# EAGLE board CH585M-R1 (EAGLE 7.7.0)
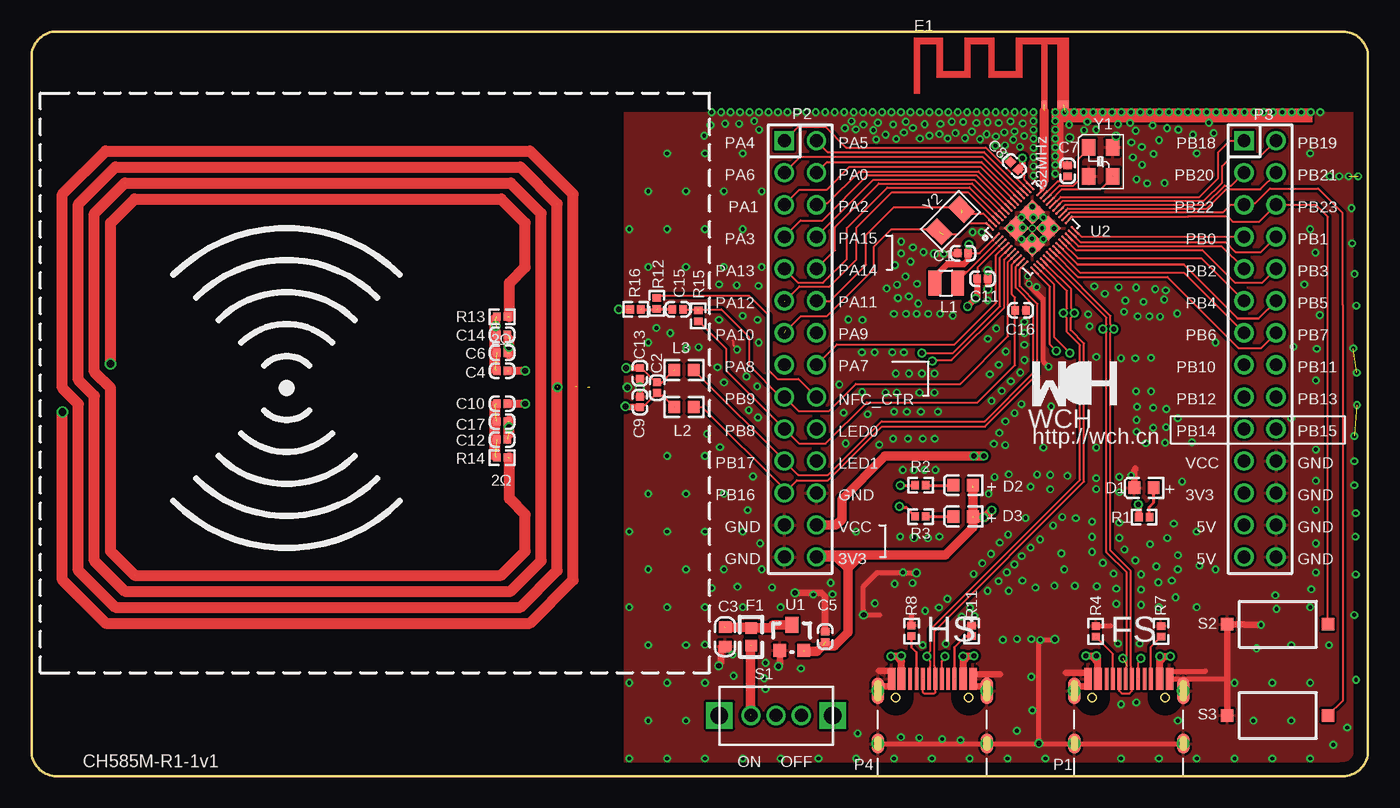
[diagram p0: board, top side]
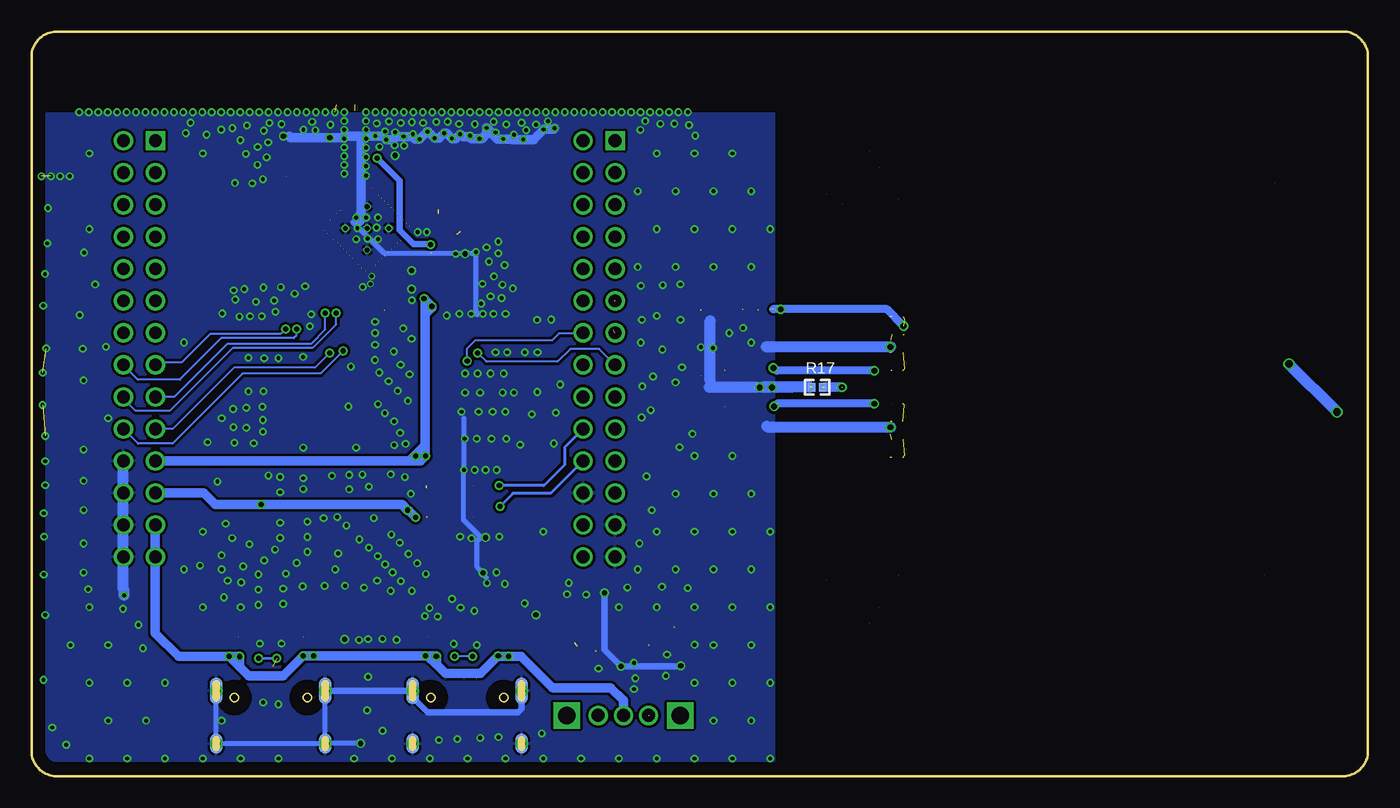
[diagram p1: board, bottom side, seen from below]

Size 106 x 59.08 mm. Coordinates in mm from the lower left corner, seen from the top.
Outline: 1.99,59.08 104,59.08 arc-90 106,57.08 106,2 arc-90 104,0 2,0 arc-90 0,2 0,57.08 arc-90 2,59.08
Copper layers (1*16): Top 0.035mm / dielectric 1.5mm / Bottom 0.035mm
Design rules "default": minimum track width 10mil, minimum drill 0.6mm, track to track 6mil, track to pad 6mil, pad to pad 6mil, via to via 6mil, smd to smd 8mil, copper to edge 40mil, drill to drill 8mil, minimum pad ring 2.5mil, minimum via ring 4mil, stop-mask expansion 4mil, vias tented up to drill 0mil, thermal gap 8mil
tRestrict: area 0,0 to 46.8,59.1; area 42.8,52.9 to 106,59.1; area 71.1,38 to 74,40.2
bRestrict: area 0,0 to 46.8,59.1; area 42.8,52.9 to 106,59.1

## Footprints (pad centres in the part's own frame; a part is rotated, then mirrored left to right if it is on the bottom)
0402_C_8B34AB = smd 0.65 x 0.6: 1 0,0; 2 0,-0.85
0402_C = smd 0.65 x 0.6: 1 0,0; 2 0,-0.85
0603_C = smd 0.93 x 0.98: 1 0,0; 2 1.54,0
0402_C_A5B067 = smd 0.65 x 0.6: 1 0,0; 2 0,-0.85
0402_C_EA6F3D = smd 0.65 x 0.6: 1 0,0; 2 0,-0.85
0603+ = smd 0.93 x 0.98: 1 0,0; 2 1.54,0
ANT-F-1-2.4G-1.6MMFR4 = smd 0.8 x 0.6: 0 1.483,0 | smd 0.4 x 0.6: 1 0,0
0603_8BD959 = smd 0.914 x 0.914: 1 0,0; 2 1.397,0
SMD_2X2MM = smd 1 x 2: 1 -0.905,0; 2 0.905,0
0603 = smd 0.93 x 0.98: 1 0,0; 2 1.54,0
TYPE-C-RECEPTACLE-2.0 = drill 0.6 pad 1: 0 -4.32,-5.15; 0_2 -4.32,-0.97; 0_3 4.32,-5.15; 0_4 4.32,-0.97 | smd 1 x 2.1 bottom: 0_2B -4.32,-0.97; 0_4B 4.32,-0.97 | smd 1 x 2.1: 0_2T -4.32,-0.97; 0_4T 4.32,-0.97 | smd 1 x 1.6 bottom: 0_3B 4.32,-5.15; 0B -4.32,-5.15 | smd 1 x 1.6: 0_3T 4.32,-5.15; 0T -4.32,-5.15 | smd 0.6 x 1.75: A1 -3.225,0; A4 -2.45,0; B1 3.225,0; B4 2.45,0 | smd 0.3 x 1.75: A5 -1.25,0; A6 -0.25,0; A7 0.25,0; A8 1.25,0; B5 1.75,0; B6 0.75,0; B7 -0.75,0; B8 -1.75,0
IDC28-2.54MM = drill 1.016 pad 1.524 square: 1 0,0 | drill 1.016 pad 1.524: 2 2.54,0; 3 0,-2.54; 4 2.54,-2.54; 5 0,-5.08; 6 2.54,-5.08; 7 0,-7.62; 8 2.54,-7.62; 9 0,-10.16; 10 2.54,-10.16; 11 0,-12.7; 12 2.54,-12.7; 13 0,-15.24; 14 2.54,-15.24; 15 0,-17.78; 16 2.54,-17.78; 17 0,-20.32; 18 2.54,-20.32; 19 0,-22.86; 20 2.54,-22.86; 21 0,-25.4; 22 2.54,-25.4; 23 0,-27.94; 24 2.54,-27.94; 25 0,-30.48; 26 2.54,-30.48; 27 0,-33.02; 28 2.54,-33.02
0402_B3DFE5 = smd 0.6 x 0.65: 1 0,0; 2 0.85,0
0402 = smd 0.6 x 0.65: 1 0,0; 2 -0.85,0
SW1 = drill 1.4 pad 1.9 square: 0 -4.5,0; 0_2 4.5,0 | drill 1.016 pad 1.524: 1 0,0; 2 -2,0; 3 2,0
SMD_6.1X3.65X2.5MM-KEY = smd 1 x 1: 1 0,0; 2 8,0
SOT-23 = smd 1.016 x 1.016: 1 0,0; 2 1.905,0 | smd 1.016 x 1.27: 3 0.965,2.032
QFN48_5X5 = drill 0.381 pad 0.559: 0 -1.219,-1.219; 0_2 -1.219,1.219; 0_5 0,0; 0_8 1.219,-1.219; 0_9 1.219,1.219 | smd 1.397 x 1.397: 0_3 -0.901,-0.895; 0_4 -0.901,0.908; 0_6 0.902,-0.895; 0_7 0.902,0.908 | smd 0.18 x 0.9: 1 -1.575,-2.519; 2 -1.225,-2.519; 3 -0.875,-2.519; 4 -0.525,-2.519; 5 -0.175,-2.519; 6 0.175,-2.519; 7 0.525,-2.519; 8 0.875,-2.519; 9 1.225,-2.519; 10 1.575,-2.519; 25 1.575,2.519; 26 1.225,2.519; 27 0.875,2.519; 28 0.525,2.519; 29 0.175,2.519; 30 -0.175,2.519; 31 -0.525,2.519; 32 -0.875,2.519; 33 -1.225,2.519; 34 -1.575,2.519 | smd 0.9 x 0.18: 11 2.514,-2.275; 12 2.514,-1.925; 13 2.514,-1.575; 14 2.514,-1.225; 15 2.514,-0.875; 16 2.514,-0.525; 17 2.514,-0.175; 18 2.514,0.175; 19 2.514,0.525; 20 2.514,0.875; 21 2.514,1.225; 22 2.514,1.575; 23 2.514,1.925; 24 2.514,2.275; 35 -2.514,2.275; 36 -2.514,1.925; 37 -2.514,1.575; 38 -2.514,1.225; 39 -2.514,0.875; 40 -2.514,0.525; 41 -2.514,0.175; 42 -2.514,-0.175; 43 -2.514,-0.525; 44 -2.514,-0.875; 45 -2.514,-1.225; 46 -2.514,-1.575; 47 -2.514,-1.925; 48 -2.514,-2.275
XT3225 = smd 1.3 x 1.1: 1 0,0; 2 2.3,0; 3 2.3,1.9; 4 0,1.9
FC-135 = smd 1.27 x 1.778: 1 0,0; 2 2.5,0

## Placement (x,y rotation side)
C1  4.7uF  [0402_C_8B34AB]  73.45,41.49 90 top
C2  NC  [0402_C]  49.61,30.4 180 top
C3  10uF  [0603_C]  55.01,11.83 270 top
C4  30pF 2%  [0402_C_A5B067]  37.75,32.17 270 top
C5  2.2uF  [0402_C]  62.96,10.64 180 top
C6  NC  [0402_C_A5B067]  37.75,33.6 270 top
C7  0.47uF  [0402_C]  82.17,47.59 180 top
C8  0.1uF  [0402_C_EA6F3D]  78.25,48.12 225 top
C9  100pF 2%  [0402_C]  48.25,29.26 180 top
C10  30pF 2%  [0402_C_A5B067]  37.75,29.55 270 top
C11  2.2uF  [0402_C_A5B067]  75.85,39.47 270 top
C12  200pf 2%  [0402_C_8B34AB]  36.9,26.71 90 top
C13  100pF 2%  [0402_C]  48.25,31.54 180 top
C14  200pf 2%  [0402_C_A5B067]  37.75,35.03 270 top
C15  10nF  [0402_C_A5B067]  51.68,37.04 270 top
C16  10nF  [0402_C_8B34AB]  78.03,36.96 90 top
C17  NC  [0402_C_8B34AB]  36.9,28.13 90 top
D1  POWER  [0603+]  89,22.88 180 top
D2  LED0  [0603+]  74.67,23.09 180 top
D3  LED1  [0603+]  74.67,20.6 180 top
E1  ANTENNA  [ANT-F-1-2.4G-1.6MMFR4]  80.34,53.28 0 top
F1  500mA  [0603_8BD959]  57.08,10.36 90 top
L1  10uH  [SMD_2X2MM]  72.56,39.13 180 top
L2  1uH  [0603]  52.52,29.29 180 top
L3  1uH  [0603]  52.52,32.22 180 top
P1  TYPE-C FS-USB  [TYPE-C-RECEPTACLE-2.0]  87.03,7.74 0 top
P2  HEADER 14x2  [IDC28-2.54MM]  59.71,50.42 0 top
P3  HEADER 14x2  [IDC28-2.54MM]  96.17,50.42 0 top
P4  TYPE-C HS-USB  [TYPE-C-RECEPTACLE-2.0]  71.45,7.74 0 top
R1  1K  [0402_B3DFE5]  88.67,20.55 180 top
R2  1K  [0402_B3DFE5]  70.08,23.09 0 top
R3  1K  [0402_B3DFE5]  70.08,20.6 0 top
R4  5.1K  [0402_B3DFE5]  84.41,11.92 270 top
R7  5.1K  [0402_B3DFE5]  89.58,11.07 90 top
R8  5.1K  [0402_B3DFE5]  69.8,11.95 270 top
R11  5.1K  [0402_B3DFE5]  74.57,11.1 90 top
R12  1kΩ  [0402_B3DFE5]  49.6,37.1 90 top
R13  1Ω(4.7Ω)  [0402_B3DFE5]  36.9,36.46 0 top
R14  1Ω(4.7Ω)  [0402_B3DFE5]  36.9,25.28 0 top
R15  NC  [0402_B3DFE5]  52.89,36.95 270 top
R16  2kΩ  [0402_B3DFE5]  47.49,37.04 0 top
R17  NC  [0402]  43.26,30.86 0 bottom
S1  SW  [SW1]  59.06,4.82 0 top
S2  RST#  [SMD_6.1X3.65X2.5MM-KEY]  94.83,12.06 0 top
S3  Download  [SMD_6.1X3.65X2.5MM-KEY]  94.83,4.82 0 top
U1  6219P33M  [SOT-23]  59.35,9.98 0 top
U2  CH585M  [QFN48_5X5]  79.38,43.46 315 top
Y1  32MHz ±10ppm 12pF 30Ω  [XT3225]  83.85,49.89 270 top
Y2  32.768K  [FC-135]  72,43.2 45 top

## Library data of the parts
C1-C17 D1-D3 E1 F1 L1-L3 P1-P4 R1-R4 R7 R8 R11-R17 S1-S3 U1 U2 Y1 Y2 = CH585M

## Nets
+3V3: C5.1 D2.1 D3.1 P2.28 P3.23 R1.2 U1.2
+5V: P1.A4 P1.B4 P3.25 P3.27 P4.A4 P4.B4 S1.1
ANT: E1.1 U2.34
BOOT: P3.5 S3.2 U2.26
GND: C1.1 C3.2 C5.2 C6.1 C7.2 C8.2 C9.2 C11.1 C12.2 C13.1 C14.1 C16.2 C17.2 D1.2 E1.0 P1.0 P1.0_2 P1.0_2B P1.0_2T P1.0_3 P1.0_3B P1.0_3T P1.0_4 P1.0_4B P1.0_4T P1.0B P1.0T P1.A1 P1.B1 P2.24 P2.25 P2.27 P3.22 P3.24 P3.26 P3.28 P4.0 P4.0_2 P4.0_2B P4.0_2T P4.0_3 P4.0_3B P4.0_3T P4.0_4 P4.0_4B P4.0_4T P4.0B P4.0T P4.A1 P4.B1 R4.1 R7.2 R8.1 R11.2 R17.2 S2.1 S3.1 U1.1 U2.0 U2.0_2 U2.0_3 U2.0_4 U2.0_5 U2.0_6 U2.0_7 U2.0_8 U2.0_9 Y1.2 Y1.4
LED0: P2.20 R2.1
LED1: P2.22 R3.1
NETC2_1: C2.1 C9.1 C10.1 L2.2
NETC2_2: C2.2 C4.1 C13.2 L3.2
NETC4_2: C4.2 C6.2 C14.2 R13.1 R16.1
NETC10_2: C10.2 C12.1 C17.1 R14.1
NETC15_2: C15.2 R12.1 R16.2
NETD1_1: D1.1 R1.1
NETD2_2: D2.2 R2.2
NETD3_2: D3.2 R3.2
NETF1_1: F1.1 S1.2
NETP1_A5: P1.A5 R4.2
NETP1_B5: P1.B5 R7.1
NETP4_A5: P4.A5 R8.2
NETP4_B5: P4.B5 R11.1
NETR13_2: R13.2 R14.2 R17.1
NFC+: L3.1 P2.21 U2.9
NFC-: L2.1 P2.23 U2.10
NFC_CTR: P2.18 R12.2
NFCI: C15.1 P2.17 R15.1 U2.7
NFCM: C16.1 P2.19 R15.2 U2.8
PA0: P2.4 U2.39
PA1: P2.5 U2.40
PA2: P2.6 U2.41
PA3: P2.7 U2.42
PA4: P2.1 U2.36
PA5: P2.2 U2.37
PA6: P2.3 U2.38
PA7: P2.16 U2.4
PA8: P2.15 U2.5
PA9: P2.14 U2.6
PA10: P2.13 U2.48 Y2.1
PA11: P2.12 U2.47 Y2.2
PA12: P2.11 U2.46
PA13: P2.9 U2.45
PA14: P2.10 U2.44
PA15: P2.8 U2.43
PB0: P3.7 U2.24
PB1: P3.8 U2.23
PB2: P3.9 U2.22
PB3: P3.10 U2.21
PB4: P3.11 U2.20
PB5: P3.12 U2.19
PB6: P3.13 U2.18
PB7: P3.14 U2.17
PB10: P1.A7 P1.B7 P3.15 U2.16
PB11: P1.A6 P1.B6 P3.16 U2.15
PB12: P3.17 P4.A7 P4.B7 U2.14
PB13: P3.18 P4.A6 P4.B6 U2.13
PB14: P3.19 U2.12
PB15: P3.20 U2.11
PB18: P3.1 U2.30
PB19: P3.2 U2.29
PB20: P3.3 U2.28
PB21: P3.4 U2.27
PB23: P3.6 S2.2 U2.25
V5V: C3.1 F1.2 U1.3
VCC: C11.2 P2.26 P3.21 U2.3
VDCIA: C1.2 C8.1 L1.2 U2.1 U2.35
VINTA: C7.1 U2.33
VSW: L1.1 U2.2
X32MI: U2.32 Y1.1
X32MO: U2.31 Y1.3

## Tracks (layer width: path | path; a pad name or v marks a point on that pad's centre or on a via)
+3V3  (via drill 0.41 pad 0.71)  (4 unrouted)
  Top 0.508: v87.8,21.56 v87.81,21.55 87.81,20.56 R1.2
  Top 0.762: 65.83,17.57 72.49,17.57 74.67,19.74 74.67,20.55 | v76.17,21.11 75.6,20.53 v75.53,20.53 75.52,20.55 74.67,20.55 | 74.67,20.55 74.67,22.88 | 61.25,9.91 62.3,9.91 62.72,10.32 63.67,10.32 64.74,11.4 64.74,16.47 | 64.74,17.57 65.83,17.57 | 62.54,17.57 63.99,17.57 | 63.99,17.57 64.74,17.57 | 64.74,16.47 64.74,17.57 | 63.82,17.4 63.99,17.57 | 64.74,16.47 65.83,17.57 | P2.28 63.82,17.4 | 63.82,17.4 64.74,16.47
  Bottom 0.762: P3.23 92.33,22.48 91.42,21.56 v87.8,21.56 76.63,21.56 v76.17,21.11 76.11,21.11 v75.53,20.53
+5V  (via drill 0.41 pad 0.71)
  Top 0.559: 89.49,9.08 89.91,9.5 | 73.89,9.12 74.3,9.53 | 68.56,9.53 69,9.09 | 84.04,9.55 84.58,9.01 | 68.56,9.53 v68.16,9.53 v68.15,9.52 | 68.56,9.53 68.97,9.53 v68.98,9.54 69,9.52 69,9.09 | 89.91,9.5 v89.5,9.5 v89.5,9.49 v89.49,9.48 89.49,9.08 | 89.91,9.5 v90.31,9.5 v90.32,9.5 | 89.49,9.08 89.49,7.75 P1.B4 | 84.04,9.55 v84.46,9.55 v84.47,9.55 84.47,9.51 84.58,9.4 84.58,9.01 | 84.04,9.55 v83.63,9.55 v83.62,9.54 | P1.A4 84.58,9.01 | 74.3,9.53 74.73,9.53 v74.74,9.54 | 74.3,9.53 v73.9,9.53 v73.89,9.52 73.89,9.12 | 73.89,9.12 P4.B4 | P4.A4 69,9.09
  Bottom 0.762: P3.25 P3.27 96.17,11.35 94.32,9.5 v90.32,9.5 | 89.5,8.68 v90.32,9.5 | 89.5,8.68 88.78,7.97 86.05,7.97 v84.47,9.55 84.46,9.54 v74.74,9.54 74.57,9.54 | 89.5,8.68 v89.5,9.49 v89.5,9.5 v90.32,9.5 | 73.89,8.86 74.57,9.54 | 74.57,9.54 73.87,9.54 v73.89,9.52 73.89,8.86 | 73.89,8.86 73.18,8.14 70.37,8.14 v68.98,9.54 68.96,9.52 v68.15,9.52 67.18,9.52 64.69,7.03 60.08,7.03 59.06,6.01 S1.1
ANT  (1 unrouted)
  Top 0.178: U2.34 80.24,46.55 arc45 80.6,47.42 80.6,48.69 | U2.34 | U2.34 | U2.34 | 80.23,47.84 80.23,46.79 arc-45 U2.34 | 80.45,47.82 80.45,47.33 arc-45 U2.34 | 80.33,47.89 80.33,47.04 arc-45 U2.34 | 80.07,47.86 80.07,46.4 arc-44 U2.34 | U2.34 arc1 80.07,46.38 | U2.34 arc1 80.07,46.38 | U2.34 arc1 80.07,46.38 | U2.34 arc0 U2.34 | U2.34 arc0 U2.34 | U2.34 arc0 U2.34 | U2.34 arc0 U2.34 | U2.34 arc0 U2.34 | U2.34 arc1 U2.34 | U2.34 arc0 U2.34 | U2.34 arc0 U2.34 | U2.34 arc0 U2.34 | U2.34 arc0 U2.34 | U2.34 arc0 U2.34 | U2.34 arc0 U2.34 | U2.34 arc0 U2.34
  Top 0.714: 80.33,47.89 80.33,52.79
BOOT
  Top 0.178: S3.2 103.98,5.98 103.98,37.39 103.98,44.69 102.05,46.62 98.23,46.62 97.06,45.46 96.29,45.46 P3.5 95.11,45.34 94.51,44.74 82.39,44.74 U2.26 | U2.26
GND  (via drill 0.3 pad 0.51, 0.3 pad 0.61, 0.41 pad 0.71, 0.46 pad 0.76)  (10 unrouted)
  Top 0.178: v55.96,33.84 55.96,33.89 55.68,34.17 55.68,34.48 55.6,34.57 | 78.99,39.67 78.98,39.66 78.98,39.08
  Top 0.381: v81.17,10.86 81.12,10.81 79.89,10.81 v79.89,2.6 | 85.6,11.96 85.58,11.94 84.43,11.94 84.41,11.96 | 79.01,39.06 80.25,37.82 80.25,32.92 v80.68,32.49 | 94.83,7.74 P1.B1 90.25,8.23 90.36,8.34 93.13,8.34 | P4.0B P4.0_3B P1.0B P1.0_3B | 67.29,12.8 v66,12.8 66,15.07 67.09,16.16 v69.13,16.16 69.15,16.14 70.18,16.14 v70.2,16.12 | v71.62,41.45 v72.36,41.45 73.4,41.45 C1.1 | 94.83,7.74 | 69.8,11.92 69.81,11.92 69.81,12.73 69.81,12.74
  Top 0.508: v97.52,12.01 96.24,12.01 96.19,12.06 S2.1 94.83,7.74 S3.1 | 81.6,48.44 81.6,52.3 81.89,52.58 | D1.2 87.46,24.26 87.54,24.34 87.54,24.4 | v60.55,14.56 62.64,14.56 62.94,14.26 62.94,11.5 C5.2 | C9.2 C13.1 | 54.68,10.29 54.68,8.98 54.51,8.81 v54.51,8.75 | v75.87,40.11 v75.86,40.11 C11.1 v75.85,38.65 | v77.18,49.25 77.18,49.2 C8.2 77.65,48.67 | 82.04,8.2 83.75,8.2 83.8,8.15 P1.A1 83.8,7.17 83.75,7.12 82.93,7.12 82.71,6.89 P1.0_2B | v59.25,8.72 59.25,8.77 59.35,8.87 U1.1 | 76.8,8.09 74.72,8.09 74.67,8.04 P4.B1 74.67,7.17 74.72,7.12 75.54,7.12 75.77,6.89 P4.0_4B | 67.2,8.35 68.18,8.35 68.22,8.3 P4.A1 68.22,7.17 68.18,7.12 67.35,7.12 67.13,6.89 P4.0_2B
  Top 0.889: 37.88,33.55 v37.88,34.06 37.88,34.61 | 37.88,28.15 v37.88,27.68 37.88,27.16
  Bottom 0.381: P1.0B P1.0_2B | 70.75,36.65 70.75,41.48 70.81,41.54 70.86,41.54 70.95,41.45 v71.62,41.45 v72.36,41.45 77.98,41.45 80.49,43.96 | 70.65,36.61 70.65,36.8 | P1.0_4B P1.0_3B P1.0B | 71.7,28.42 v71.7,24.3 71.7,24.21 71.74,24.18 71.74,20.32 70.35,18.93 | 70.35,18.93 70.39,18.93 70.65,18.67 70.65,16.57 v70.2,16.12 | v69.98,18.93 70.35,18.93 | 69.94,15.77 70.2,16.03 | v79.89,2.6 v79.89,2.59 P1.0B
  Bottom 0.508: v60.55,14.56 60.55,10.02 v59.25,8.72 54.54,8.72 v54.51,8.75 | P1.0_2B P4.0_4B 75.77,6.25 74.57,5.06 67.42,5.06 67.13,5.35 P4.0_2B
  Bottom 0.635: 48.21,30.84 v48.25,30.84
  Bottom 0.762: 79.86,50.78 81.19,50.78 81.33,50.65 v82.34,50.65 85.43,50.65 85.57,50.78 | 79.86,50.78 79.47,50.78 79.46,50.8 v78.73,50.8 78.16,50.8 v77.87,50.5 77.28,50.5 77.03,50.76 v76.49,50.76 | 79.86,44.59 79.86,50.78 | 79.93,44.04 79.93,44.59 | 76.47,50.72 75.76,50.72 75.58,50.54 v75.23,50.54 74.64,51.14 v74.58,51.14 74.56,51.14 v74.04,50.62 73.69,50.62 v73.29,51.02 73.09,51.02 v72.66,50.6 72.37,50.6 v72.01,50.95 71.79,50.72 71.22,50.72 71.09,50.59 v70.46,50.59 70.28,50.59 69.91,50.97 69.91,51.22 | v69.91,51.44 69.03,50.56 v68.58,50.56 67.9,50.56 67.86,50.52 v66.99,50.52 66.17,50.52 v65.38,51.31 v65.38,51.32 64.61,51.32 v64.51,51.41
  Bottom 0.889: 47.71,34.06 v37.88,34.06 37.9,34.03 | 44.29,30.86 48.02,30.86 | 45.71,30.84 48.21,30.84 | v98.66,14.36 98.66,14.77 98.71,14.83 P3.28 P3.26 P3.24 P3.22 | 52.18,31.36 52.18,36.13 | 47.58,27.68 | v37.88,27.68 47.58,27.68 | v48.25,30.84 52.26,30.84 | 47.58,27.68 47.67,27.78
  other vias: 54.54,39.02 55.94,38.96 57.67,38.91 57.59,36.21 57.22,23.77 53.59,27.16 49.56,35.57 50.66,35.16 52.91,34.04 54.92,31.24 47.26,30.84 71.64,26.78 71.61,31.95 71.61,30.43 75.84,14.7 77.51,14.7 87.89,10.52 70.68,10.4 78.16,10.89 74.8,12.7 73.78,12.66 88,13.59 101.5,14.83 101.87,25.91 101.87,23.44 101.87,21.12 101.87,18.47 101.87,16.16 101.41,13.4 101.41,7.4 101.87,31.4 101.94,33.91 86.05,13.67 92.41,13.4 89.41,13.4 98.75,13.28 98.41,7.4 97.17,10.15 96.91,4.4 90.91,4.4 79.38,5.22 78.16,3.6 99.91,4.4 99.91,10.4 102.91,10.4 93.91,16.4 92.41,19.4 92.63,16.71 90.44,15.52 89.37,15.38 88,14.8 88,16.01 85.83,16.07 84.5,15.06 82.75,15.09 81.14,15.11 102.18,36.59 100.09,34.07 99.91,28.4 74.44,13.35 70.2,36.69 71.12,36.69 72.07,36.69 69.36,36.69 68.41,36.69 73.07,36.55 68.72,37.93 70.33,37.49 67.82,38.7 69.59,38.07 68.65,38.99 74.72,16.04 65.9,36.2 64.78,36.22 72.65,14.06 56.42,36.53 57.68,34.4 72.51,10.5 101.41,49.4 101.41,43.4 101.41,1.4 98.41,1.4 95.41,7.4 95.41,1.4 92.41,49.4 93.91,34.4 92.41,1.4 90.91,28.4 90.91,16.4 89.41,1.4 86.41,1.4 81.91,16.4 80.41,1.4 77.41,1.4 75.91,22.4 74.41,1.4 71.41,1.4 68.41,1.4 65.41,19.4 65.41,1.4 62.41,1.4 59.41,13.4 59.41,1.4 56.41,49.4 57.91,46.4 56.41,43.4 57.91,40.4 54.61,26.1 56.41,19.4 57.91,16.4 56.41,13.4 56.41,1.4 53.41,49.4 54.91,46.4 53.41,43.4 54.91,40.4 53.41,25.4 54.91,22.4 53.41,19.4 54.91,16.4 53.41,13.4 53.41,7.4 53.41,1.4 50.41,49.4 51.91,46.4 50.41,43.4 51.91,40.4 50.41,25.4 51.91,22.4 50.41,19.4 51.91,16.4 50.41,13.4 51.91,10.4 50.41,7.4 51.91,4.4 50.41,1.4 48.91,46.4 47.41,43.4 48.91,40.4 48.91,34.4 48.91,22.4 47.41,19.4 48.91,16.4 47.41,13.4 48.91,10.4 47.41,7.4 48.91,4.4 47.41,1.4 66.88,33.63 69.19,33.63 68.27,33.63 65.87,33.63 70.62,31.95 71.1,18.87 69.6,31.95 65.88,30.48 67.74,30.43 68.63,30.43 70.42,30.43 68.55,31.95 64.07,31.07 56.7,31.71 57.55,30.93 57.62,28.46 86.17,10.52 54.41,32.45 79.73,38.82 88.8,33.19 87.55,33.16 86.42,33.17 84.46,33.27 84.45,26.07 77.51,23.95 79.24,22.97 82.17,23.83 84.45,22.78 77.95,16.8 77.36,16.17 78.85,20.48 77.46,19.17 75.41,16.89 64.41,28.84 67.24,26.3 77.67,31.34 76.95,30.57 76.15,29.78 71.9,28.92 70.55,28.92 69.44,28.92 68.42,28.92 66.32,28.71 64.58,26.39 78.42,32.03 78.76,33.02 78.75,34.23 78.74,35.16 78.75,36.05 54.52,36.21 77.27,33.7 76.77,27.24 77.24,28.15 92.04,26.5 89.91,26.46 89.99,27.69 90.01,29.13 88.79,30.53 88.97,29.23 88.97,27.64 88.38,26.41 87.65,27.33 87.65,28.26 87.69,29.31 87.6,30.54 80.87,29.33 80.26,26.07 77.23,26.27 76.32,26.37 77.97,28.8 78.52,29.52 70.69,26.78 69.52,26.78 68.34,26.78 75.85,34.71 76.73,32.65 76.02,31.89 56.88,29.04 51.95,33.96 83.92,35.7 83.81,36.65 84.45,23.64 90.08,18.9 76.39,23.73 79.76,23.93 80.8,23.9 62.01,14.41 103.25,2.49 104.36,3.86 105.05,7.65 104.7,45.07 104.75,42.28 104.93,39.85 105.07,37.33 104.84,33.94 105.11,32.02 105.13,29.45 104.91,26.99 104.91,24.99 104.91,23.09 105.03,20.87 105,19 105.03,16 104.91,12.79 100.96,39.01 101.83,41.54 86.66,36.85 90.87,36.71 89.84,37.81 89.12,38.65 87.61,38.76 86.23,38.79 86.76,37.74 85.13,38.28 84.3,38.87 65.04,51.96 66.77,51.25 69.19,51.08 90.07,51.42 89,49.37 89.87,47.06 88.49,47.03 79.46,44.32 78.63,43.52 79.35,42.65 80.16,43.49 75.37,43.17 74.65,43.17 56.81,21.1 57.79,18.47 63.39,15.34 63.53,14.43 58.74,14.97 56,15.03 53.95,14.92 53.41,10.43 55.59,9.65 55.68,7.97 58.22,9 58.11,7.77 58.21,6.91 61.03,8.53 65.53,3.4 68.95,3.1 70.42,3.04 72.22,2.95 73.69,2.87 90.6,20.03 90.93,17.53 90.74,14.18 89.22,16.65 88.72,18.41 87.21,23.85 82.83,20.47 81.75,20.56 81.03,19.89 71.97,13.38 76.7,15.48 78.54,17.45 79.24,18.13 79.99,18.78 76.8,18.53 76.1,17.64 68.49,40.55 75.84,37.75 76.52,35.53 80.8,22.76 91.26,23.37 69.11,24.3 79.01,39.67 79.11,39.06 76.45,50.03 71.22,50.81 79.47,48.39 79.47,49.12 78.4,49.94 79.47,47.65 77.16,51.08 77.97,51.15 89.97,38.54 86.28,23.74 84.12,18.98 84.12,20.19 84.12,17.79 84.97,16.93 86.05,14.88 86.69,17.98 87.54,17.13 88.2,37.63 80.24,44.33 78.52,44.33 78.52,42.6 80.24,42.6 70.88,13.12 66.88,13.71 68.45,15.26 68.98,42.42 68.98,41.49 69.32,39.65 69.72,40.83 69.9,41.95 70.23,39.07 83.75,51.92 87.13,51.83 93.39,51.84 93.76,51.02 92.12,50.89 90.95,51.29 89.43,50.46 88.92,51.63 86.17,51.72 87.58,51.21 88.06,49.93 88.09,48.51 87.65,47.36 87.35,49.1 87.23,50.28 84.44,51.29 82.3,51.69 83.48,51.24 68.89,19 72.01,19 69.88,15.33 79.31,7.89 81.68,17.68 78.6,15.51 77.05,10.82 79.63,14.95 80.01,10.81 79.31,10.88 70.85,24.3 69.99,24.3 70.75,41.58 53.36,50.82 55.01,51.76 53.85,51.65 55.45,52.68 54.69,52.68 53.94,52.68 77.2,50.05 65.98,51.7 72.99,51.93 69.34,51.93 68.34,51.71 67.74,50.9 67.13,51.85 57.71,51.28 57.33,51.98 56.12,51.76 70.84,51.73 72.09,51.75 73.89,51.91 74.94,51.83 75.76,50.93 76.72,51.83 75.83,51.89 77.65,51.95 78.62,51.79 79.47,49.85 79.47,50.59 79.47,51.28 79.47,51.98 79.47,52.68 78.72,52.68 77.97,52.68 77.22,52.68 76.47,52.68 75.72,52.68 74.97,52.68 74.21,52.68 73.46,52.68 72.71,52.68 71.96,52.68 71.21,52.68 70.46,52.68 69.71,52.68 59.2,52.68 59.95,52.68 60.7,52.68 61.45,52.68 62.2,52.68 62.95,52.68 63.7,52.68 64.45,52.68 65.21,52.68 65.96,52.68 66.71,52.68 67.46,52.68 68.21,52.68 68.96,52.68 56.2,52.68 56.95,52.68 57.7,52.68 58.45,52.68 102.97,47.6 103.72,47.6 104.47,47.6 105.22,47.6 92.46,52.68 93.21,52.68 93.96,52.68 94.71,52.68 95.46,52.68 96.21,52.68 96.96,52.68 97.71,52.68 98.46,52.68 99.21,52.68 99.96,52.68 100.71,52.68 101.47,52.68 102.22,52.68 91.71,52.68 90.95,52.68 90.2,52.68 89.45,52.68 88.7,52.68 87.95,52.68 87.2,52.68 86.45,52.68 85.7,52.68 84.95,52.68 84.2,52.68 83.45,52.68 82.7,52.68 81.94,52.68 81.19,52.68 81.19,51.98 81.19,51.28 81.19,50.59 81.19,49.89 81.19,49.19 81.19,48.5 81.19,47.8 89.51,36.45 88.67,36.49 87.73,36.48 86.42,5.7 87.62,5.85 86.28,18.9 86.28,20.11 86.28,22.53 86.02,50.78
  pour Top (isolate 0.203, rank 3): 0,0 106,0 106,59.08 0,59.08
  pour Bottom (isolate 0.203, rank 3): 0,0 106,0 106,59.08 0,59.08
LED0  (via drill 0.41 pad 0.71)
  Top 0.254: R2.1 70.07,23.07 68.91,23.07 v68.9,23.06
  Bottom 0.254: v68.9,23.06 65.36,23.06 63.7,24.72 63.7,26.1 P2.20
LED1  (via drill 0.41 pad 0.71)
  Top 0.254: R3.1 70.08,20.62 69.37,21.33 68.93,21.33 v68.84,21.42
  Bottom 0.254: P2.22 64.82,22.44 67.81,22.44 v68.84,21.42
NETC2_1  (via drill 0.46 pad 0.76)  (3 unrouted)
  Top 0.178: L2.2 50.98,29.32 50.6,29.7 50.58,29.7 50.07,30.21 49.81,30.21 C2.1 48.47,29.26 C9.1
  Top 0.254: 48.21,29.3 C9.1
  Top 0.508: v47.11,29.34 47.15,29.3 48.21,29.3
  Top 0.635: 37.76,29.55 v39.16,29.55
  Bottom 0.635: 47.07,29.34 47.12,29.29 | 47.07,29.34 46.86,29.55 v39.16,29.55 | 47.07,29.34 v47.11,29.34
NETC2_2  (via drill 0.46 pad 0.76)  (5 unrouted)
  Top 0.178: C2.2 50.01,31.25 50.58,31.82 50.6,31.82 50.98,32.2 L3.2 | 49.61,31.15 49.61,31.23 49.38,31.46 49.3,31.46 48.58,32.18 48.46,32.18 C13.2
  Top 0.508: v47.16,32.39 C13.2
  Top 0.635: 37.82,32.17 v39.16,32.17
  Bottom 0.635: v47.16,32.39 47.12,32.39 46.91,32.17 v39.16,32.17
NETC4_2  (via drill 0.46 pad 0.76)  (7 unrouted)
  Top 0.635: v46.57,37.04 R16.1
  Top 0.889: 36.77,32.29 36.77,35.03 36.77,36.26
  Bottom 0.635: 38.17,37.04 47.17,37.04 | 38.16,37.04 38.17,37.04 | v36.84,35.71 38.17,37.04
NETC10_2  (4 unrouted)
  Top 0.889: 36.77,25.45 36.77,29.44
NETC15_2  (2 unrouted)
  Top 0.254: 49.63,37.04 48.41,37.04 48.39,37.02 | R12.1 49.63,37.07 50.8,37.07 C15.2 | 49.63,37.04
NETD1_1
  Top 0.254: D1.1 89,21.71 88.68,21.38 R1.1
NETD2_2  (1 unrouted)
  Top 0.254: R2.2 D2.2 | D2.2
NETD3_2  (1 unrouted)
  Top 0.254: R3.2 D3.2 | D3.2
NETF1_1  (2 unrouted)
  Top 0.762: S1.2 57.04,10.35 57.03,10.36
NETP1_A5  (1 unrouted)
  Top 0.178: 84.43,11.07 84.64,10.86 84.64,10.83 85.78,9.7 P1.A5
NETP1_B5  (1 unrouted)
  Top 0.178: P1.B5 88.78,10.26 89.35,10.83 89.35,10.86 89.56,11.07
NETP4_A5
  Top 0.203: R8.2 | R8.2 69.8,10.22 70.2,9.82 P4.A5
NETP4_B5  (2 unrouted)
  Top 0.203: R11.1 74.06,11.1 73.2,10.24 P4.B5
NETR13_2  (via drill 0.46 pad 0.76, 0.6 pad 0.9)  (15 unrouted)
  Top 0.889: 37.9,36.46 37.9,39.13 39.16,40.38 39.16,43.88 37.25,45.79 8.17,45.79 6.26,43.88 v6.26,32.7 | 37.9,25.28 37.9,22.02 39.16,20.77 39.16,17.85 37.25,15.94 8.17,15.94 6.26,17.85 6.26,30.8 4.99,32.07 4.99,44.64 7.41,47.06 38.01,47.06 40.43,44.64 40.43,17.08 38.01,14.67 7.41,14.67 | v2.45,28.89 2.45,15.56 5.88,12.13 39.54,12.13 42.97,15.56 42.97,46.17 39.54,49.6 5.88,49.6 2.45,46.17 2.45,30.8 3.72,29.53 3.72,16.32 6.64,13.4 38.77,13.4 41.7,16.32 41.7,30.86 41.7,45.4 38.77,48.33 6.64,48.33 | 7.41,14.67 4.99,17.08 4.99,30.16 3.72,31.43 3.72,45.4 6.64,48.33 | 7.41,14.67 | 6.64,48.33
  Bottom 0.762: v41.73,30.86 43.12,30.86
  Bottom 0.889: v2.45,28.89 v6.26,32.7
NFC+  (2 unrouted)
  Top 0.178: 63.89,24.62 | 63.89,24.62 67.43,28.16 75.61,28.16 79.48,32.03 79.48,37.34 78.07,38.76 78.07,40.42 U2.9 | 63.89,24.62 63.18,23.92 60.81,23.92 P2.21 59.71,25.04 52.92,31.82 52.9,31.82 52.52,32.2 L3.1 | U2.9
NFC-  (1 unrouted)
  Top 0.178: 65.82,26.12 67.44,27.74 75.62,27.74 79.79,31.91 79.79,37.47 78.37,38.88 78.37,40.23 U2.10 | 65.82,26.12 63.18,23.48 60.71,23.48 P2.23 59.71,22.78 53.19,29.29 L2.1 | 65.82,26.12 | U2.10
NFC_CTR
  Top 0.178: R12.2 49.77,38.11 56.89,38.11 58.48,36.53 58.48,32.2 59.15,31.53 60.81,31.53 P2.18
NFCI  (2 unrouted)
  Top 0.178: C15.1 52.89,37.04 54.71,37.04 56.93,34.82 56.93,32.57 59.4,30.1 P2.17 60.83,28.98 63.25,28.98 65.39,31.12 73.67,31.12 77.46,34.91 77.46,40.8 U2.7
NFCM  (2 unrouted)
  Top 0.178: R15.2 52.91,36.1 55.11,33.91 55.11,32.16 P2.19 60.88,26.39 62.98,26.39 66.25,29.66 75.04,29.66 78,32.62 78,36.96 78,37.98 77.76,38.22 77.76,40.61 U2.8
PA0  (1 unrouted)
  Top 0.178: U2.39 75.35,48.73 63.11,48.73 P2.4
PA1  (1 unrouted)
  Top 0.178: U2.40 75.25,48.34 64.89,48.34 63.07,46.53 60.9,46.53 P2.5
PA2  (1 unrouted)
  Top 0.178: U2.41 75.11,47.98 65.65,47.98 63.13,45.47 62.38,45.47 P2.6
PA3  (1 unrouted)
  Top 0.178: U2.42 74.93,47.67 66.31,47.67 62.73,44.1 61.01,44.1 P2.7
PA4  (1 unrouted)
  Top 0.178: U2.36 78.22,47.35 78.21,47.35 77.05,48.51 77.05,48.52 75.69,49.88 64.61,49.88 62.95,51.54 60.83,51.54 P2.1
PA5
  Top 0.178: P2.2 63.14,49.53 75.55,49.53 U2.37
PA6  (1 unrouted)
  Top 0.178: P2.3 60.98,49.14 75.43,49.14 U2.38
PA7  (1 unrouted)
  Top 0.178: P2.16 63.88,34.27 73.21,34.27 76.5,37.55 76.5,41.32 U2.4
PA8  (via drill 0.41 pad 0.71)  (1 unrouted)
  Top 0.178: v70.62,33.57 73.08,33.57 76.81,37.3 76.81,41.13 U2.5
  Bottom 0.178: v70.62,33.57 69.93,32.88 64.28,32.88 63.27,33.9 60.97,33.9 P2.15
PA9  (via drill 0.41 pad 0.71)  (1 unrouted)
  Top 0.178: v71.44,32.93 71.52,33.01 72.98,33.01 77.15,37.19 77.15,40.99 U2.6 | U2.6
  Bottom 0.178: v71.44,32.93 71.44,33.94 70.8,34.57 64.72,34.57 64.17,35.13 62.29,35.13 P2.14
PA10  (3 unrouted)
  Top 0.178: Y2.1 71.8,43.39 68.19,43.39 66.82,42.03 66.82,40.25 63.07,36.5 61.04,36.5 59.93,35.4 59.83,35.4 | 72.27,42.95 72.33,43.02 73.53,43.02 74.39,43.88 75.74,43.88 75.74,43.89 U2.48
PA11  (2 unrouted)
  Top 0.178: P2.12 63.34,37.72 66.19,40.57 66.19,42.94 68.4,45.14 73.58,45.14 Y2.2 | 73.68,44.55 73.76,44.64 75.49,44.64 U2.47
PA12  (2 unrouted)
  Top 0.178: 59.77,37.72 60.9,38.85 63.29,38.85 65.42,40.97 65.42,43.51 68.25,46.34 74.28,46.34 U2.46
PA13  (1 unrouted)
  Top 0.178: P2.9 60.81,39.15 62.78,39.15 64.66,41.03 64.66,42.12 64.66,43.5 67.88,46.71 74.4,46.71 U2.45
PA14  (1 unrouted)
  Top 0.178: P2.10 63.73,41.74 63.73,43.55 67.2,47.02 74.59,47.02 U2.44
PA15  (1 unrouted)
  Top 0.178: U2.43 74.78,47.32 66.77,47.32 P2.8
PB0  (1 unrouted)
  Top 0.178: U2.24 83.27,42.8 P3.7
PB1  (1 unrouted)
  Top 0.178: U2.23 83.21,42.36 94.71,42.36 95.48,41.58 97.5,41.58 P3.8
PB2
  Top 0.178: P3.9 94.37,42.06 83.02,42.06 U2.22
PB3  (1 unrouted)
  Top 0.178: P3.10 97.61,39.15 95.44,39.15 92.84,41.75 82.83,41.75 U2.21
PB4  (1 unrouted)
  Top 0.178: U2.20 82.98,41.11 92.78,41.11 P3.11
PB5  (1 unrouted)
  Top 0.203: P3.12 | U2.19 82.98,40.61 91.39,40.61 95.68,36.32 97.32,36.32 P3.12
PB6  (1 unrouted)
  Top 0.178: U2.18 83.16,39.94 91.41,39.94 P3.13
PB7  (1 unrouted)
  Top 0.178: U2.17 83,39.6 90.09,39.6 95.72,33.98 97.52,33.98 P3.14
PB10  (via drill 0.41 pad 0.71)  (1 unrouted)
  Top 0.178: P1.B7 86.28,6.76 86.47,6.56 87.08,6.56 87.28,6.76 P1.A7 87.21,7.8 87.21,8.7 87.19,8.73 87.19,16.3 85.58,17.91 85.58,35.2 v85.85,35.47 85.85,35.57 85.58,35.84 85.58,36.51 81.04,41.05 81.04,41.06 U2.16
  Bottom 0.178: v85.85,35.47 86.23,35.09 91.83,35.09 94.09,32.82 95.99,32.82 P3.15
PB11  (via drill 0.41 pad 0.71)  (3 unrouted)
  Top 0.178: P1.B6 87.78,9 87.98,9.21 v87.98,9.35 | 84.99,35.52 85.25,35.26 85.25,17.77 86.86,16.16 86.86,8.73 86.84,8.7 86.84,7.8 P1.A6 | 84.99,35.52 84.99,35.57 85.25,35.84 85.25,36.37 80.81,40.81 80.8,40.81 U2.15 | v84.99,35.47 84.99,35.52
  Bottom 0.178: 84.99,35.5 v84.99,35.47 84.99,34.97 85.2,34.76 90.95,34.76 94.24,31.46 97.57,31.46 98.71,32.6 P3.16
  Bottom 0.203: v86.55,9.35 v87.98,9.35
PB12  (via drill 0.41 pad 0.71)  (2 unrouted)
  Top 0.178: P4.B7 70.7,6.67 70.81,6.56 71.58,6.56 71.7,6.68 P4.A7 71.64,7.8 71.64,8.7 71.61,8.73 71.61,11.51 83.48,23.38 83.48,34.34 82.43,35.39 82.43,36.36 82.7,36.63 v82.7,36.73 82.7,36.86 82.46,37.11 82.46,38.64 80.55,40.55 80.55,40.57 U2.14
  Bottom 0.178: v82.7,36.73 82.7,35.44 83.84,34.31 90.47,34.31 94.68,30.1 P3.17
PB13  (via drill 0.41 pad 0.71)  (2 unrouted)
  Top 0.178: v72.44,9.52 72.44,9.38 72.2,9.13 P4.B6 | P4.A6 71.26,7.8 71.26,8.7 71.28,8.73 71.28,9.11 71.01,9.39 v71.01,9.52 71.01,9.66 71.28,9.93 71.28,11.65 83.15,23.52 83.15,34.2 82.1,35.26 82.1,36.36 81.84,36.63 v81.84,36.73 81.97,36.87 81.97,36.95 82.13,37.11 82.13,38.51 80.32,40.32 80.3,40.32 U2.13
  Top 0.203: 71.01,9.38 71.01,9.39 | 71.01,9.66
  Bottom 0.178: v81.84,36.73 81.84,35.84 83.7,33.98 90.05,33.98 95.04,28.98 97.75,28.98 98.71,29.94 P3.18 | v71.01,9.52 v72.44,9.52
  Bottom 0.203: v72.44,9.52 v72.44,9.51 | v71.01,9.52
PB14  (via drill 0.41 pad 0.71)  (1 unrouted)
  Top 0.178: v82.36,33.58 81.12,34.82 81.12,39.01 U2.12 | U2.12
  Bottom 0.178: v82.36,33.58 83.52,32.41 89.94,32.41 94.79,27.56 P3.19
PB15  (via drill 0.41 pad 0.71)  (1 unrouted)
  Top 0.178: v81.29,33.75 80.79,34.25 80.79,38.84 U2.11 | U2.11
  Bottom 0.178: v81.29,33.75 83.09,31.95 89.26,31.95 94.81,26.4 97.56,26.4 P3.20
PB18
  Top 0.178: U2.30 81.63,45.95 92.64,45.95 94.12,47.44 94.12,49.5 95.04,50.42 P3.1
PB19
  Top 0.178: U2.29 81.82,45.65 92.98,45.65 94.43,47.1 94.43,48.41 95.16,49.14 97.44,49.14 P3.2
PB20  (1 unrouted)
  Top 0.178: U2.28 82.01,45.34 93.1,45.34 94.63,46.87 95.17,46.87 P3.3
PB21  (1 unrouted)
  Top 0.178: U2.27 82.2,45.04 93.23,45.04 94.76,46.57 97.46,46.57 98.71,47.82 P3.4
PB23  (1 unrouted)
  Top 0.178: U2.25 82.53,44.39 91.71,44.39 91.76,44.43 94.84,44.43 95.27,44 97.38,44 P3.6 101.88,45.34 102.83,44.38 S2.2
V5V  (1 unrouted)
  Top 0.762: 55.01,11.8 56.99,11.8 57.03,11.76 F1.2 58.55,11.76 58.81,12.02 U1.3
VCC  (via drill 0.41 pad 0.71)  (1 unrouted)
  Top 0.178: U2.3 75.07,40.39 75.07,39.55 C11.2
  Top 0.508: v74.25,37.28 v74.88,37.91 75,38.03 C11.2
  Top 0.762: P2.26 63.82,19.94 64.26,20.38 64.26,21.96 67.71,25.4 v74.75,25.4 v75.54,25.4 v75.55,25.4
  Bottom 0.762: 75.66,25.02 76.06,25.02 | 74.79,36.64 74.79,37.82 | 74.79,26.29 74.79,36.64 | 74.79,26.29 76.06,25.02 | 75.66,25.02 75.14,25.02 v74.75,25.4 74.79,25.44 74.79,25.89 | 74.79,25.89 75.66,25.02 | 74.25,37.18 74.79,36.64 | 74.79,25.89 74.79,26.29 | 76.06,25.02 P3.21 | v74.25,37.28 74.79,37.82 | 74.79,37.82 v74.88,37.91
VDCIA  (via drill 0.41 pad 0.71)  (2 unrouted)
  Top 0.178: U2.1 75.19,41.49 C1.2 | U2.35 78.75,47.31 78.75,47.66 78.35,48.06 78.29,48.12 C8.1
  Top 0.508: C1.2 74.3,42.15 v74.33,42.18 | 74.27,41.49 74.27,40.95 73.96,40.64 72.66,40.64 71.65,39.63 L1.2 | v78.59,49.03 78.6,49.02 78.6,48.47 C8.1 | C8.1
  Bottom 0.508: v74.33,42.18 74.35,42.2 75.69,42.2 76.8,43.31 76.8,47.24 v78.59,49.03
VINTA
  Top 0.178: C7.1 82.15,47.59 81.76,47.2 81.39,47.2 U2.33
VSW  (1 unrouted)
  Top 0.178: 74.23,40.04 U2.2 | 74.09,39.91 74.23,40.04 | 73.68,39.49 74.09,39.91 | 73.7,39.97 73.75,39.92 73.76,39.91 74.09,39.91 | L1.1 73.46,39.63 73.88,40.04 74.23,40.04
X32MI
  Top 0.178: U2.32 81.54,46.86 82.63,46.86 83.01,47.24 83.01,48.96 83.85,49.79 Y1.1
X32MO  (2 unrouted)
  Top 0.178: U2.31 81.73,46.56 84.81,46.56 85.75,47.49 Y1.3
(copper drawn outside any net)
  shapes: Top area x13

## Text on the board
tPlace: 32MHz | PA4 | PA5 | PB18 | PB19 | PA6 | PA0 | PB20 | PB21 | PA1 | PA2 | PB22 | PB23 | PA3 | PA15 | PB0 | PB1 | PA13 | PA14 | PB2 | PB3 | PA12 | PA11 | PB4 | PB5 | 2Ω | PA10 | PA9 | PB6 | PB7 | PA8 | PA7 | PB10 | PB11 | PB9 | NFC_CTR | PB12 | PB13 | PB8 | LED0 | WCH | PB14 | PB15 | http://wch.cn | PB17 | LED1 | VCC | GND | 2Ω | + | + | PB16 | GND | 3V3 | GND | + | GND | VCC | 5V | GND | GND | 3V3 | 5V | GND | HS | FS | CH585M-R1-1v1 | ON | OFF